# Altium PCB KOTROLER_TRANSPORTA.PcbDoc (part 4 of 4)
Units mm, origin at the board's own origin, x right, y up, seen from the top; angles counter-clockwise.
Board outline 160 x 100 mm, 2 copper layers (Top Layer, Bottom Layer); 436 components, 440 nets, 1414 pads, 154 vias.
Unrouted connection lines stored in the file: 1.
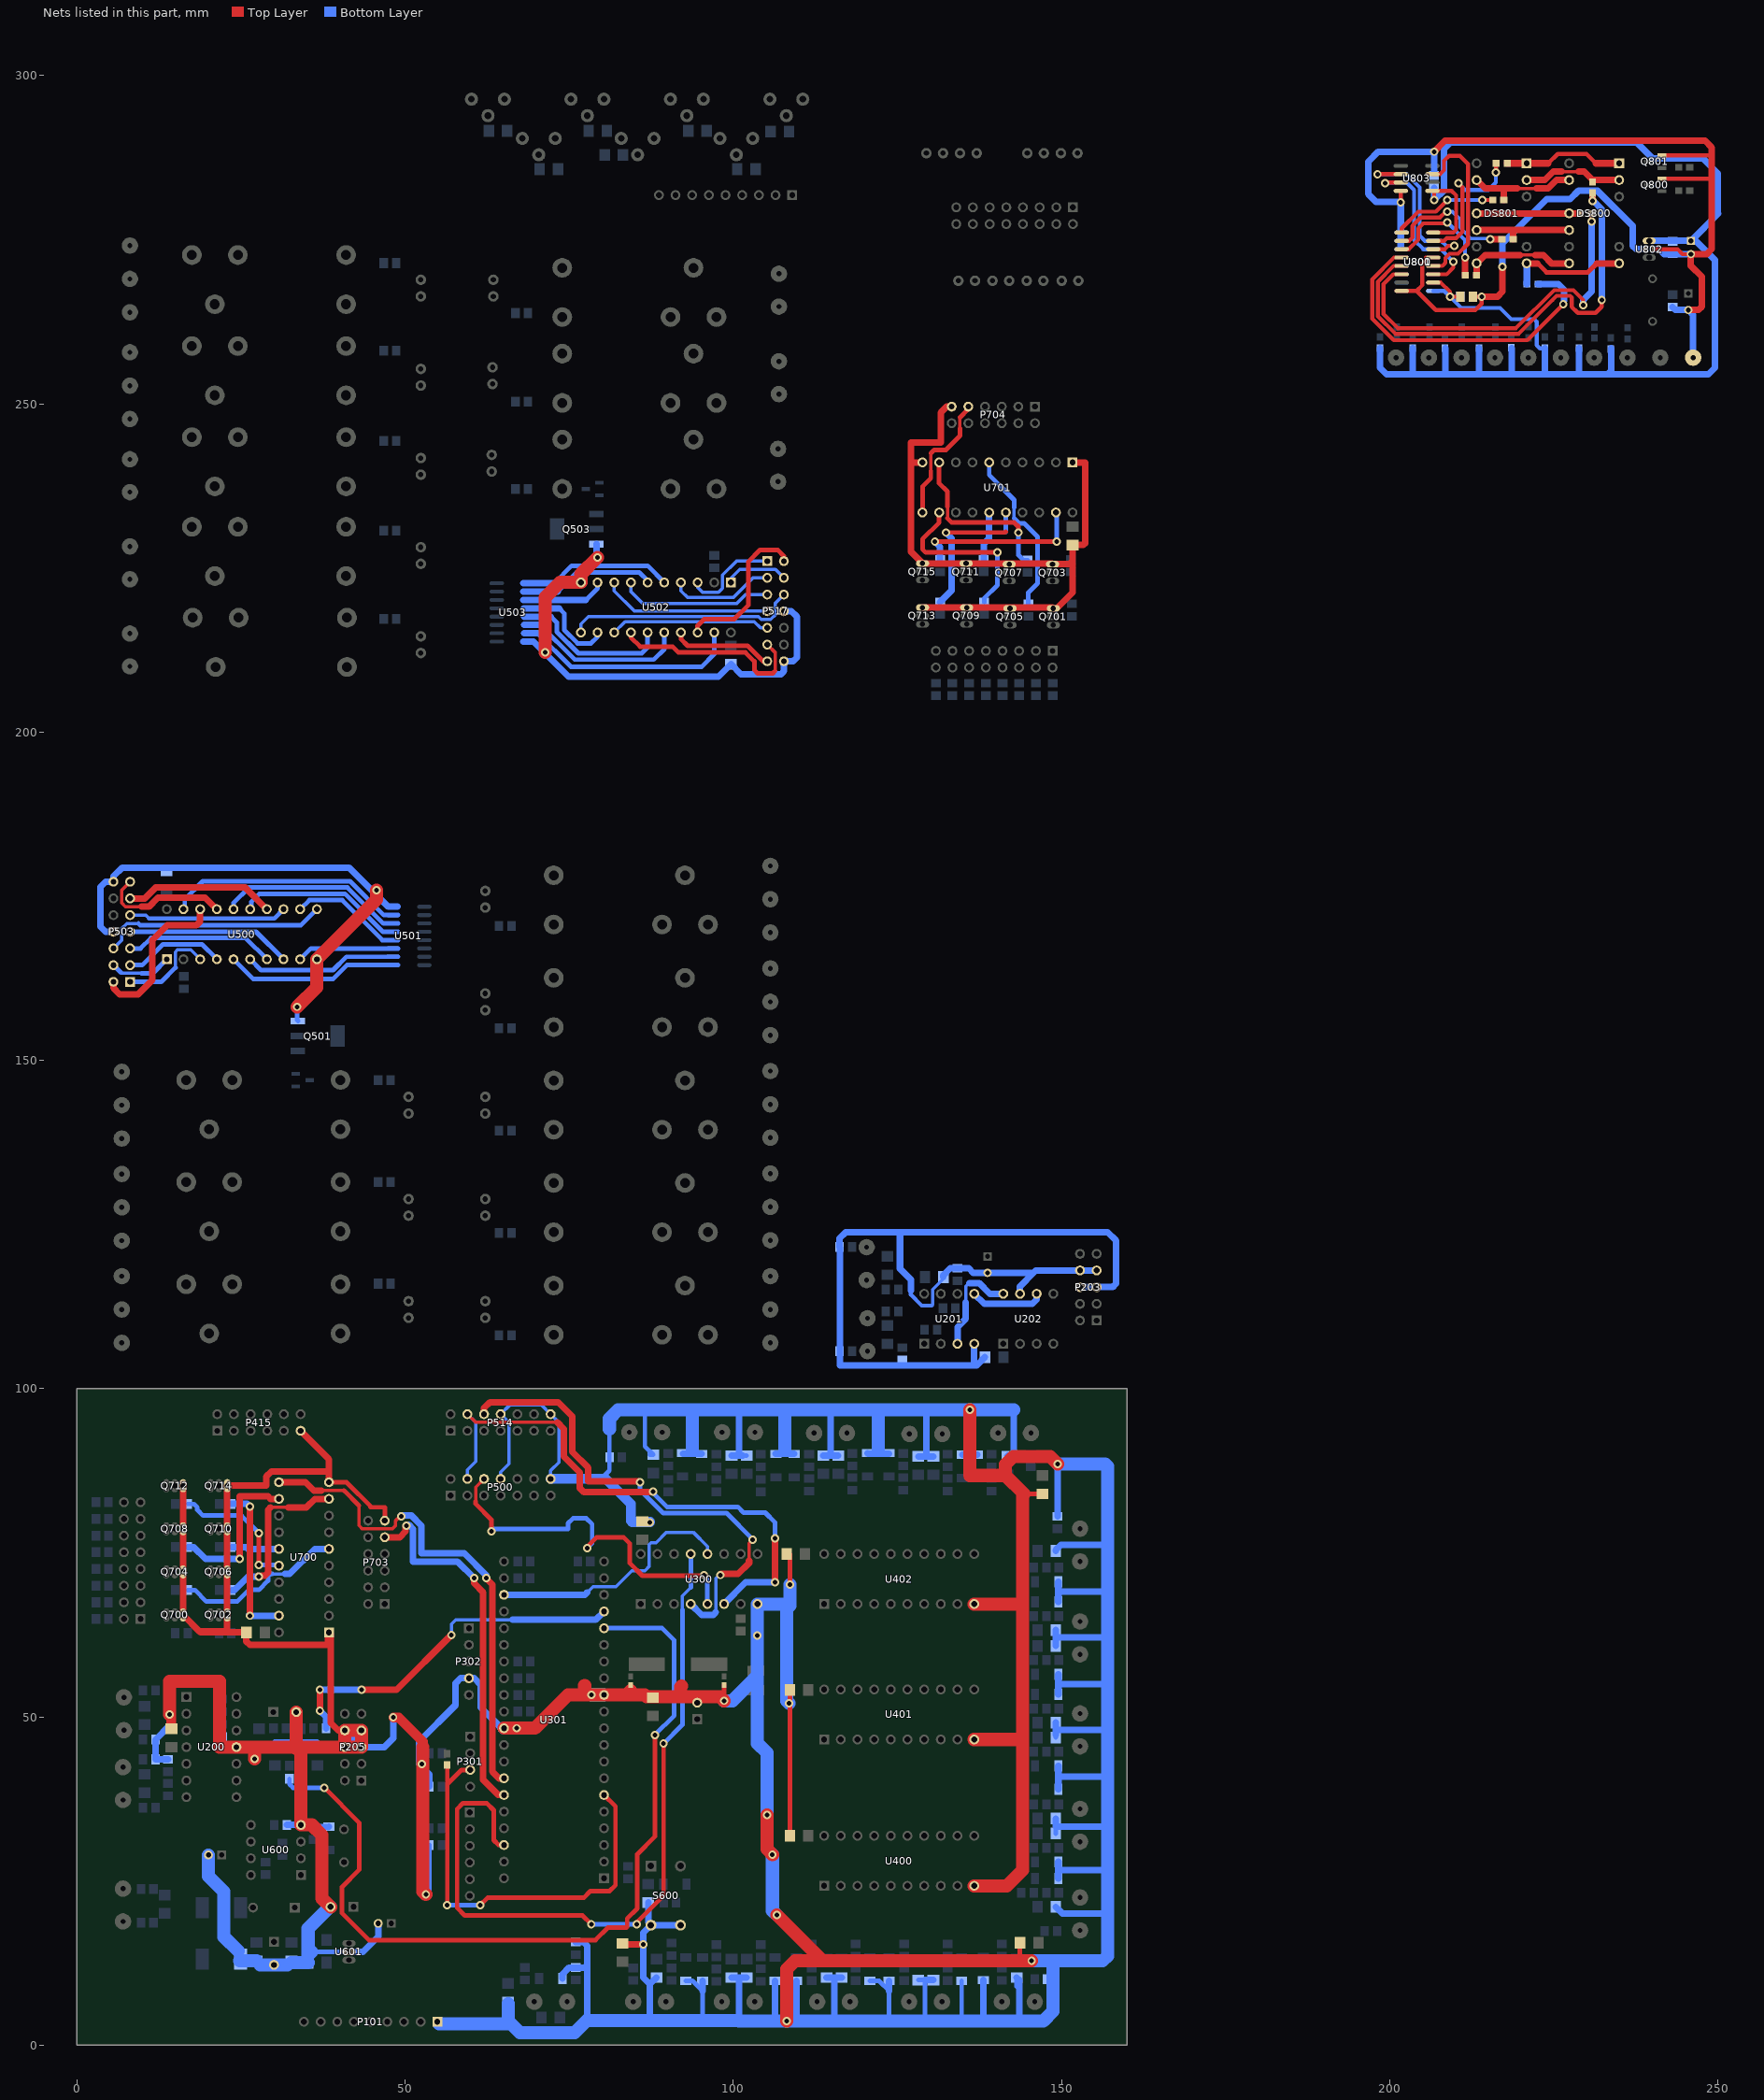
[diagram p4: the nets of this part, all layers, seen from the top]

## Via types
v1: diameter 1.27, hole 0.711, Top Layer to Bottom Layer, 154 vias

## Nets (pads, with @x,y where several pads share a name; then routed paths per layer and width w, separated by ;. In a path a pad name is that pad's centre, name@x,y a point inside that pad or via, vN(x,y) a via of type N, cw(c..) or ccw(c..) an arc to the next point about the centre after c; other vN are vias at no path point) (continued)
NetR706_2: R706.2 U700.6 | length 25.9
  Bottom Layer w0.5: 29.751,71.788 31.656,71.788
  Bottom Layer w0.7: R706.2@16.858,69.333 17.982,69.333 19.718,67.597 24.417,67.597 26.195,69.375 27.719,69.375 29.108,70.764 29.108,71.399 29.497,71.788 29.751,71.788
  Bottom Layer w1: 31.656,71.788 32.418,71.788 36.228,75.598 U700.6@38.387,75.598
NetR708_2: R708.2 U701.6 | length 25.6
  Bottom Layer w0.5: 142.781,232.57 142.781,234.221
  Bottom Layer w0.7: U701.6@138.971,241.079 138.971,239.174 142.781,235.364 142.781,234.221 ; 142.781,232.57 143.543,231.808 144.305,231.808 146.337,229.776 146.337,222.664 144.94,221.267 R708.2@144.94,219.55
NetR715_2: R715.2 U700.9 | length 26.5
  Top Layer w0.5: 29.497,81.948 32.164,81.948
  Top Layer w1: v1@27.592,71.534 v1(27.719,71.407) 27.846,71.28 28.1,71.534 28.608,71.534 29.116,72.042 29.116,81.567 29.497,81.948 ; 32.164,81.948 34.958,81.948 36.228,83.218 U700.9@38.387,83.218
  Bottom Layer w1: R715.2@23.526,69.333 23.994,69.333 26.068,71.407 v1(27.719,71.407)
NetR717_2: R717.2 U701.9 | length 26.4
  Top Layer w0.5: 132.621,232.57 132.621,234.348
  Top Layer w0.7: U701.9@131.351,241.079 131.351,237.904 132.621,236.634 132.621,234.348 ; 132.621,232.57 133.256,231.935 142.781,231.935 143.416,231.3 v1(143.416,230.411)
  Bottom Layer w0.7: v1(143.416,230.411) 143.416,226.982 144.18,226.218 R717.2@144.841,226.218
NetR724_2: R724.2 U700.12 | length 24.3
  Top Layer w1: v1(24.798,74.074) 24.798,83.599 29.116,83.599 29.497,83.218 U700.12@30.767,83.218
  Bottom Layer w1: R724.2@16.858,75.894 17.771,75.894 19.591,74.074 v1(24.798,74.074)
NetR725_2: R725.2 U701.12 | length 26.7
  Top Layer w0.7: U701.12@131.351,233.459 131.351,231.935 128.811,229.395 128.811,227.871 129.319,227.363 v1(140.241,227.363)
  Bottom Layer w0.7: R725.2@138.209,219.804 138.209,220.378 140.241,222.41 v1(140.241,227.363)
NetR726_2: R726.2 U700.15 | length 7.4
  Bottom Layer w1: R726.2@23.526,75.894 25.772,75.894 26.068,75.598 U700.15@30.767,75.598
NetR727_2: R727.2 U701.15 | length 7.5
  Bottom Layer w1: R727.2@138.152,226.345 138.152,228.703 138.971,229.522 U701.15@138.971,233.459
NetR728_2: R728.2 U700.16 | length 20.9
  Top Layer w0.7: v1(27.719,73.185) v1(27.719,78.011)
  Bottom Layer w0.7: R728.2@16.858,82.456 17.813,82.456 18.321,81.948 18.321,81.567 19.21,80.678 25.052,80.678 v1(27.719,78.011) ; v1(27.719,73.185) 30.64,73.185 U700.16@30.767,73.058
NetR729_2: R729.2 U701.16 | length 24
  Top Layer w0.7: v1(132.367,230.411) 141.384,230.411 141.511,230.538
  Bottom Layer w0.7: 141.384,230.411 141.511,230.538 U701.16@141.511,233.459
  Bottom Layer w1: R729.2@131.478,219.804 133.256,221.582 133.256,229.522 v1(132.367,230.411)
NetR730_2: R730.2 U700.19 | length 24.2
  Top Layer w1: v1(26.322,65.438) v1(26.322,82.075)
  Bottom Layer w1: R730.2@23.526,82.456 25.941,82.456 v1(26.322,82.075) ; v1@26.203,65.557 v1(26.322,65.438) U700.19@30.767,65.438
NetR731_2: R731.2 U701.19 | length 26.1
  Top Layer w0.7: v1(130.716,229.014) v1(149.258,229.014)
  Bottom Layer w0.7: U701.19@149.131,233.459 149.258,233.332 v1(149.258,229.014)
  Bottom Layer w1: v1(130.716,229.014) 131.478,228.252 R731.2@131.478,226.281
NetR800_1: R800.1 U800.15 | length 22.2
  Top Layer w0.6: U800.15@206.616,274.828 208.28,274.828 208.696,275.244 209.301,275.244 209.311,275.255 210.104,275.255 211.074,276.225 211.074,282.956 v1(210.439,283.591) ; v1(216.154,285.242) 216.193,285.281 R800.1@216.193,286.639
  Bottom Layer w0.6: v1(210.439,283.591) 211.455,282.575 215.011,282.575 216.154,283.718 v1(216.154,285.242)
NetR801_1: R801.1 U800.1 | length 16.3
  Top Layer w0.6: U800.1@201.816,276.098 201.816,276.746 204.343,279.273 207.01,279.273 v1(208.788,281.051) ; v1(214.122,281.051) R801.1@215.685,281.051
  Bottom Layer w0.6: v1(208.788,281.051) v1(214.122,281.051)
NetR802_1: R802.1 U800.2 | length 20.6
  Top Layer w0.6: U800.2@201.816,274.828 202.946,274.828 203.47,275.352 203.47,276.469 203.453,276.486 203.453,277.113 204.724,278.384 207.645,278.384 208.534,279.273 v1(208.788,279.273)
  Top Layer w1: v1(215.304,275.082) R802.1@217.082,275.082
  Bottom Layer w0.5: v1(208.788,279.273) 209.55,279.273 210.693,278.13 210.693,276.86 212.36,275.193 215.193,275.193 v1(215.304,275.082)
NetR803_1: R803.1 U800.3 | length 18.7
  Top Layer w0.6: U800.3@201.816,273.558 202.884,273.558 204.343,275.017 204.343,276.733 205.105,277.495 v1@208.788,277.495
  Top Layer w1: R803.1@211.494,269.621 v1(211.494,272.288)
  Bottom Layer w0.6: v1(208.788,277.622) 211.455,274.955 211.455,272.327 v1(211.494,272.288)
NetR804_1: R804.1 U800.4 | length 50.6
  Top Layer w0.6: U800.4@201.816,272.288 200.658,272.288 197.336,268.966 197.336,262.972 200.612,259.696 220.961,259.696 v1(226.441,265.176)
  Bottom Layer w1: R804.1@222.592,268.224 225.679,268.224 226.522,267.381 v1@226.522,265.684
NetR805_1: R805.1 U800.5 | length 67.9
  Top Layer w0.6: U800.5@201.816,271.018 200.595,271.018 198.19,268.613 198.19,263.326 200.842,260.674 219.655,260.674 224.724,265.742 224.724,265.745 225.425,266.446 227.487,266.446 227.711,266.222 227.711,264.795 228.646,263.86 231.348,263.86 232.283,264.795 v1(232.283,265.811)
  Top Layer w1: R805.1@230.886,282.106 v1(230.886,280.924) v1@231.013,280.924
  Bottom Layer w1: v1(230.886,280.924) 231.013,280.924 232.283,279.654 v1(232.283,265.811)
NetR806_1: R806.1 U800.6 | length 57.6
  Top Layer w0.6: U800.6@201.816,269.748 200.533,269.748 199.044,268.259 199.044,263.679 201.195,261.528 219.237,261.528 225.044,267.335 227.965,267.335 229.489,265.811 v1(229.489,265.049) ; v1@230.72,277.788 R806.1@230.72,279.019
  Bottom Layer w1: v1(229.489,265.049) 229.489,265.811 230.759,267.081 v1(230.759,277.749)
NetU201_3: U201.3 U202.8 | length 15.9
  Bottom Layer w0.5: 135.415,113.19 135.415,115.603 135.923,116.111
  Bottom Layer w1: U201.3@134.145,106.84 134.145,109.38 135.415,110.65 135.415,113.19 ; 135.923,116.111 137.447,116.111 139.098,114.46 U202.8@141.13,114.46
NetU201_5: U201.5 U202.6 | length 11.3
  Bottom Layer w1: U201.5@136.685,114.46 138.209,112.936 145.575,112.936 146.21,113.571 U202.6@146.21,114.46
NetU500_5: U500.5 U501.1 | length 27.2
  Bottom Layer w0.7: U500.5@23.846,165.41 26.832,162.424 39.036,162.424 41.133,164.521 U501.1@48.928,164.521
NetU500_6: U500.6 U501.2 | length 24.1
  Bottom Layer w0.7: U500.6@26.386,165.41 28.037,163.759 39.022,163.759 41.054,165.791 U501.2@48.928,165.791
NetU500_9: U500.9 U501.3 | length 15.6
  Bottom Layer w0.7: U500.9@34.006,165.41 35.657,167.061 U501.3@48.928,167.061
NetU500_12: U500.12 U501.4 | length 18
  Bottom Layer w0.7: U500.12@34.006,173.03 35.403,174.427 40.419,174.427 46.515,168.331 U501.4@48.928,168.331
NetU500_15: U500.15 U501.5 | length 26.5
  Bottom Layer w0.7: U500.15@26.386,173.03 26.576,173.22 26.576,174.173 27.784,175.381 40.814,175.381 46.594,169.601 U501.5@48.928,169.601
NetU500_16: U500.16 U501.6 | length 29.3
  Bottom Layer w0.7: U500.16@23.846,173.03 23.846,173.983 26.198,176.335 41.209,176.335 46.673,170.871 U501.6@48.928,170.871
NetU500_19: U500.19 U501.7 | length 37.4
  Bottom Layer w0.7: U500.19@16.416,173.22 16.416,174.554 19.151,177.289 41.604,177.289 46.753,172.141 U501.7@48.928,172.141
  Bottom Layer w1: U500.19@16.226,173.03 U500.19@16.416,173.22
NetU502_5: U502.5 U503.1 | length 23.6
  Bottom Layer w0.7: 72.706,222.679 75.373,225.346 86.93,225.346 U502.5@89.47,222.806
  Bottom Layer w1: U503.1@68.007,222.679 72.706,222.679
NetU502_6: U502.6 U503.2 | length 20.9
  Bottom Layer w0.5: U502.6@86.93,222.806 U502.6@86.93,223.06
  Bottom Layer w0.7: 73.214,221.409 76.135,224.33 85.66,224.33 U502.6@86.93,223.06
  Bottom Layer w1: U503.2@68.007,221.409 73.214,221.409
NetU502_9: U502.9 U503.3 | length 12.9
  Bottom Layer w0.7: 77.532,220.139 79.31,221.917 U502.9@79.31,222.806
  Bottom Layer w1: U503.3@68.007,220.139 77.532,220.139
NetU502_12: U502.12 U503.4 | length 16
  Bottom Layer w0.5: U502.12@79.31,214.551 U502.12@79.31,215.186
  Bottom Layer w0.7: 73.468,218.869 74.23,218.107 74.23,215.567 76.262,213.535 78.294,213.535 U502.12@79.31,214.551
  Bottom Layer w1: U503.4@68.08,218.869 73.468,218.869
NetU502_15: U502.15 U503.5 | length 24.6
  Bottom Layer w0.7: 72.198,217.599 73.087,216.71 73.087,215.299 76.375,212.011 86.033,212.011 86.93,212.908 U502.15@86.93,215.186
  Bottom Layer w1: U503.5@68.134,217.599 72.198,217.599
NetU502_16: U502.16 U503.6 | length 26.7
  Bottom Layer w0.7: 70.547,216.329 75.822,211.055 87.879,211.055 89.47,212.646 U502.16@89.47,215.186
  Bottom Layer w1: U503.6@68.134,216.329 70.547,216.329
NetU502_19: U502.19 U503.7 | length 35.2
  Bottom Layer w0.7: 70.166,215.059 75.246,209.979 95.185,209.979 97.09,211.884 U502.19@97.09,215.186
  Bottom Layer w1: U503.7@68.134,215.059 70.166,215.059
O1_DATA0: P517.1 U502.3 | length 14.8
  Bottom Layer w0.5: U502.3@94.55,222.806 94.55,222.044 95.312,221.282 97.725,221.282 98.36,221.917 98.36,223.949 100.456,226.045 P517.1@105.155,226.045
O1_DATA1: P517.3 U502.4 | length 16.1
  Bottom Layer w0.5: U502.4@92.01,222.806 92.01,221.536 93.026,220.52 100.011,220.52 102.996,223.505 P517.3@105.155,223.505
O1_DATA2: P517.5 U502.7 | length 23.5
  Bottom Layer w0.5: U502.7@84.39,222.806 84.39,221.409 86.168,219.631 100.519,219.631 101.853,220.965 P517.5@105.155,220.965
O1_DATA3: P517.7 U502.8 | length 25.9
  Bottom Layer w0.5: U502.8@81.85,222.806 81.85,221.536 84.962,218.425 P517.7@105.155,218.425
O1_DATA4: P517.9 U502.13 | length 24.4
  Bottom Layer w0.5: U502.13@81.85,215.186 83.501,216.837 103.186,216.837 104.139,215.885 P517.9@105.155,215.885
O1_DATA5: P517.11 U502.14 | length 30.5
  Top Layer w0.5: P517.11@105.155,213.345 106.409,212.091 106.409,209.392 106.361,209.344
  Top Layer w0.7: U502.14@84.39,215.186 84.39,214.424 85.787,213.027 90.74,213.027 91.629,212.138 101.837,212.138 103.186,210.789 103.186,209.471 103.694,208.963 105.98,208.963 106.361,209.344
O1_DATA6: P517.13 U502.17 | length 15.6
  Top Layer w0.7: U502.17@92.01,215.186 92.01,214.17 93.026,213.154 102.17,213.154 104.52,210.805 P517.13@105.155,210.805
O1_DATA7: P517.2 U502.18 | length 24
  Top Layer w0.7: U502.18@94.55,215.186 94.55,216.219 95.549,217.218 100.138,217.218 102.297,219.377 102.297,225.981 104.075,227.759 106.742,227.759 107.695,226.807 P517.2@107.695,226.045
O1_OUT_CLK: P517.6 U502.11 | length 35.5
  Bottom Layer w0.5: U502.11@76.77,215.186 76.77,216.456 77.913,217.599 103.821,217.599 104.25,217.171 105.674,217.171 106.409,217.905 106.409,219.679 P517.6@107.695,220.965
O1_OUT_ENABLE: P517.4 U502.1 | length 9.8
  Bottom Layer w0.5: U502.1@99.63,222.806 99.63,223.441 100.98,224.791 106.409,224.791 P517.4@107.695,223.505
O2_DATA0: P503.1 U500.3 | length 14.7
  Bottom Layer w0.5: 15.019,164.14 14.972,164.187 14.972,166.506 15.305,166.839 17.337,166.839 U500.3@18.766,165.41
  Bottom Layer w0.7: P503.1@8.098,161.981 12.86,161.981 15.019,164.14
O2_DATA1: P503.3 U500.4 | length 15.5
  Bottom Layer w0.7: P503.3@8.098,164.521 9.939,164.521 13.111,167.693 19.023,167.693 U500.4@21.306,165.41
O2_DATA2: P503.5 U500.7 | length 22.8
  Bottom Layer w0.7: P503.5@8.098,167.061 9.685,167.061 11.271,168.647 25.689,168.647 U500.7@28.926,165.41
O2_DATA3: P503.7 U500.8 | length 25.1
  Bottom Layer w0.7: P503.7@8.098,169.601 27.275,169.601 U500.8@31.466,165.41
O2_DATA4: P503.9 U500.13 | length 24.2
  Bottom Layer w0.5: P503.9@8.098,172.141 10.479,172.141 10.987,171.633
  Bottom Layer w0.7: 10.987,171.633 30.069,171.633 U500.13@31.466,173.03
O2_DATA5: P503.11 U500.14 | length 22.9
  Top Layer w1: P503.11@8.098,174.681 10.32,174.681 11.971,176.332 25.624,176.332 U500.14@28.926,173.03
O2_DATA6: P503.13 U500.17 | length 19.8
  Top Layer w0.5: P503.13@8.098,177.221 6.844,175.967 6.844,173.966 7.399,173.411 9.812,173.411
  Top Layer w1: 9.812,173.411 10.955,173.411 12.352,174.808 19.528,174.808 U500.17@21.306,173.03
O2_DATA7: P503.2 U500.18 | length 24.6
  Top Layer w1: P503.2@5.558,161.981 5.558,161.028 6.51,160.076 9.304,160.076 11.463,162.235 11.463,168.331 13.749,170.617 18.194,170.617 18.766,171.189 U500.18@18.766,173.03
O2_OUT_CLK: P503.6 U500.11 | length 34.7
  Bottom Layer w0.5: P503.6@5.558,167.061 6.844,168.347 6.844,170.12 7.595,170.871 9.368,170.871
  Bottom Layer w0.7: 9.368,170.871 9.622,170.617 34.133,170.617 U500.11@36.546,173.03
O2_OUT_ENABLE: P503.4 U500.1 | length 9.5
  Bottom Layer w0.5: 6.701,163.378 6.812,163.267 9.796,163.267
  Bottom Layer w0.7: P503.4@5.558,164.521 6.701,163.378 ; 9.796,163.267 11.543,163.267 U500.1@13.686,165.41
OUT1_CLK: P514.10 U300.4 | length 75.9
  Top Layer w0.5: 102.395,73.82 102.395,76.487 v1(102.903,76.995)
  Top Layer w1: P514.10@62.009,96.135 62.009,97.061 62.898,97.95 73.312,97.95 75.455,95.807 75.455,90.407 77.868,87.994 77.868,85.885 85.631,85.885 v1(85.758,85.758) ; v1(98.044,71.628) 98.044,71.755 98.077,71.788 100.744,71.788 102.395,73.439 102.395,73.82
  Bottom Layer w0.5: 97.315,65.946 97.315,71.153 v1@98.077,71.915
  Bottom Layer w0.7: v1(85.758,85.758) 85.758,84.615 89.314,81.059 98.982,81.059 v1@102.903,77.138
  Bottom Layer w1: U300.4@93.505,67.216 95.156,65.565 96.934,65.565 97.315,65.946 ; v1(102.903,76.995) v1@102.903,77.138
OUT2_CLK: P500.10 U300.5 | length 58
  Top Layer w0.5: 60.739,82.837 60.739,84.996 P500.10@62.009,86.266
  Top Layer w0.7: 60.739,82.837 60.739,82.456 63.152,80.043 v1(63.152,78.265) ; v1@77.63,75.852 79.121,77.343 83.312,77.343 84.234,76.421 84.234,73.433 86.133,71.534 v1@95.156,71.534
  Bottom Layer w0.7: v1(63.152,78.265) 63.152,78.519 63.279,78.646 74.803,78.646 74.803,79.502 75.565,80.264 77.597,80.264 78.486,79.375 78.486,76.454 v1(77.757,75.725) ; v1@95.283,71.661 96.045,70.899 U300.5@96.045,67.038 ; v1@95.41,71.722 v1(95.504,71.628)
OUTPUT_ENABLE: P500.9 P514.9 U300.6 | length 86.9
  Top Layer w0.5: P514.9@59.469,96.135 60.723,94.881 73.206,94.881
  Top Layer w1: 73.206,94.881 74.201,93.886 74.201,89.695 76.614,87.282 76.614,84.869 77.249,84.234 v1@87.79,84.234 ; v1(106.332,70.518) v1(106.332,77.249)
  Bottom Layer w0.5: P500.9@59.469,86.266 59.469,87.663 60.739,88.933 60.739,94.865 P514.9@59.469,96.135
  Bottom Layer w0.7: v1(87.79,84.361) 87.79,84.107 89.884,82.013 100.679,82.013 101.554,81.138 104.856,81.138 106.332,79.662 v1(106.332,77.249)
  Bottom Layer w1: U300.6@98.585,67.216 101.887,70.518 v1(106.332,70.518)
PWM1_OUT: R203.1 U301.16 | length 132.8
  Top Layer w0.7: v1(37.676,39.225) 42.984,33.917 42.984,26.728 40.386,24.13 40.386,20.107 44.458,16.035 78.994,16.035 80.866,17.907 83.693,17.907 83.82,18.034 83.82,19.304 85.344,20.828 85.344,29.083 88.044,31.783 v1(88.044,47.277)
  Bottom Layer w0.7: R203.1@32.357,40.593 32.357,39.784 32.916,39.225 v1(37.676,39.225) ; U301.16@80.297,63.533 89.156,63.533 90.999,61.69 90.999,50.232 v1(88.044,47.277)
PWM2_OUT: R209.1 U301.17 | length 55.5
  Top Layer w1: v1(36.99,50.96) v1(36.99,54.135) ; v1(43.34,54.135) 48.674,54.135 v1(57.056,62.517)
  Bottom Layer w0.5: v1(57.056,62.517) 57.056,64.168 57.691,64.803 66.327,64.803
  Bottom Layer w1: v1(36.99,50.96) 37.94,50.01 R209.1@37.94,48.266 ; v1(36.99,54.135) v1(43.34,54.135) ; 66.327,64.803 79.027,64.803 U301.17@80.297,66.073
SEG_A: DS800.1 DS801.1 R800.2 | length 18.2
  Top Layer w0.6: 224.155,286.639 225.587,288.071 229.962,288.071 231.394,286.639
  Top Layer w1: R800.2@217.893,286.639 DS801.1@220.853,286.639 224.155,286.639 ; 231.394,286.639 DS800.1@234.95,286.639
SEG_B: DS800.13 DS801.13 R801.2 | length 17
  Top Layer w0.5: 219.456,282.829 222.377,282.829
  Top Layer w1: DS801.13@213.233,284.099 214.503,282.829 217.297,282.829 ; R801.2@217.385,281.051 217.385,282.741 217.297,282.829 ; 219.456,282.829 217.297,282.829 ; 222.377,282.829 224.15,282.829 225.42,284.099 DS800.13@227.33,284.099
SEG_C: DS800.10 DS801.10 R802.2 | length 15.4
  Top Layer w1: DS801.10@213.233,276.479 DS800.10@227.33,276.479 ; R802.2@218.782,275.082 218.782,276.391
SEG_D: DS800.8 DS801.8 R803.2 | length 16.9
  Top Layer w0.5: 219.837,272.669 222.123,272.669
  Top Layer w1: R803.2@213.194,269.621 213.233,269.66 DS801.8@213.233,271.399 214.503,272.669 219.837,272.669 ; 222.123,272.669 223.393,272.669 224.663,271.399 DS800.8@227.33,271.399
SEG_E: DS800.7 DS801.7 R804.2 | length 18.4
  Top Layer w0.7: 222.504,271.399 223.858,270.045 230.167,270.045 230.251,270.129
  Top Layer w0.76: 230.251,270.129 231.521,271.399
  Top Layer w1: DS801.7@220.853,271.399 222.504,271.399 ; 231.521,271.399 DS800.7@234.95,271.399
  Bottom Layer w1: DS801.7@220.853,271.399 220.892,271.36 R804.2@220.892,268.224
SEG_F: DS800.2 DS801.2 R805.2 | length 15.2
  Top Layer w0.5: 226.187,285.369 228.727,285.369
  Top Layer w1: DS801.2@220.853,284.099 DS801.2@220.853,284.099 223.647,284.099 224.917,285.369 226.187,285.369 ; 228.727,285.369 229.615,285.369 230.885,284.099 DS800.2@234.95,284.099
SEG_G: DS800.11 DS801.11 R806.2 | length 15.8
  Top Layer w1: DS801.11@213.233,279.019 DS800.11@227.33,279.019 R806.2@229.02,279.019
SH_CLK: U800.11 U801.11 U803.7 | length 26.2
  Top Layer w0.6: v1(199.263,283.591) 199.39,283.718 U803.7@201.689,283.718 ; U800.11@206.616,269.748 208.661,269.748 209.677,270.764 v1(209.677,271.653)
  Bottom Layer w0.6: 199.898,283.718 202.565,283.718 203.708,282.575 203.708,274.955 205.105,273.558 U801.11@206.616,273.558 207.742,273.558 209.393,271.907 209.677,271.907 v1(209.677,271.653)
SH_DATA: U800.14 U801.10 U803.6 | length 27.5
  Top Layer w0.6: v1(198.12,284.988) U803.6@201.689,284.988 ; U800.14@206.616,273.558 208.407,273.558 208.915,274.066 v1(209.804,274.066)
  Bottom Layer w0.6: v1(198.12,284.988) 202.565,284.988 204.562,282.991 204.562,275.625 205.359,274.828 U801.10@206.616,274.828 207.839,274.828 208.601,274.066 v1(209.804,274.066)
SH_LATCH: U800.12 U803.3 | length 27.2
  Top Layer w0.6: U803.3@206.489,284.988 207.645,284.988 208.28,285.623 208.28,287.02 209.042,287.782 210.693,287.782 211.928,286.547 211.928,274.403 210.402,272.877 209.123,272.877 208.488,272.242 208.488,271.48 208.026,271.018 U800.12@206.616,271.018
SHIFT_LATCH: U300.12 U301.23 | length 38.9
  Bottom Layer w0.5: 77.759,68.992 78.635,69.867 82.085,69.867 84.514,72.296 86.52,72.296 87.171,72.947 87.171,76.249 87.453,76.531 88.215,76.531 89.822,78.138 93.886,78.138 96.045,75.979 U300.12@96.045,74.836
  Bottom Layer w1: U301.23@65.057,68.613 77.381,68.613 77.759,68.992
SHIFT_OE: U300.13 U301.38 | length 116.1
  Top Layer w0.7: U301.38@65.057,30.513 64.229,30.513 63.5,31.242 63.5,35.804 62.415,36.888 58.809,36.888 57.912,35.992 57.912,20.945 59.088,19.769 77.02,19.769 v1(78.341,18.448) ; v1(85.25,18.448) 85.25,18.702 89.365,22.817 v1(89.365,45.956)
  Bottom Layer w0.5: 92.235,66.327 92.235,68.454 93.505,69.724
  Bottom Layer w0.7: v1(78.341,18.448) v1(85.25,18.448) ; v1(89.365,45.956) 92.235,48.826 92.235,66.327 ; 93.505,69.724 U300.13@93.505,74.836
SIG1_CLK: U301.34 U700.11 | length 76.6
  Top Layer w0.5: 37.244,84.488 40.673,84.488 ; 42.959,82.202 42.959,79.154 43.467,78.646 48.039,78.646 48.547,79.154 48.547,79.916 49.309,80.678 v1(49.403,80.584)
  Top Layer w0.7: 40.673,84.488 42.959,82.202
  Top Layer w1: U700.11@30.767,85.758 34.831,85.758 36.101,84.488 37.244,84.488 ; v1@62.357,71.12 63.295,70.182 63.295,41.673 64.295,40.673 U301.34@65.057,40.673
  Bottom Layer w1: v1(49.403,80.584) 49.309,80.678 50.96,80.678 52.484,79.154 52.484,74.93 58.994,74.93 62.357,71.567 v1@62.357,71.12
  other v1: 62.357,71.153
SIG2_CLK: P703.9 U301.35 | length 56.6
  Top Layer w1: P703.9@46.896,77.376 49.182,77.376 50.071,78.265 50.071,79.027 v1(50.198,79.154) ; v1(60.485,71.153) 60.485,70.391 61.89,68.986 61.89,40.411 64.168,38.133 U301.35@65.057,38.133
  Bottom Layer w1: v1(50.198,79.154) 50.579,79.154 50.579,79.281 51.214,78.646 51.214,73.66 57.978,73.66 v1(60.485,71.153)
SIG_2_CLK: P704.9 U701.11 | length 20.1
  Top Layer w0.5: 130.081,239.809 130.081,242.476 ; 134.526,246.286 134.526,247.937
  Top Layer w0.7: U701.11@128.811,233.459 128.811,237.396 130.081,238.666 130.081,239.809 ; 130.081,242.476 130.589,242.984 132.367,242.984 134.526,245.143 134.526,246.286 ; 134.526,247.937 135.796,249.207 P704.9@135.796,249.588
T0CKI: P301.3 R313.1 U301.6 | length 67.2
  Top Layer w0.7: R313.1@56.388,42.711 56.421,42.678 56.421,39.784 ; v1(56.389,21.344) 56.421,21.344 56.421,39.784 ; P301.3@59.914,41.943 58.58,41.943 56.421,39.784 ; v1(61.425,21.344) 62.56,22.479 77.216,22.479 78.232,23.495 81.153,23.495 82.042,24.384 82.042,36.388 U301.6@80.297,38.133
  Bottom Layer w0.7: v1(56.389,21.344) v1(61.425,21.344)
VDD_ED: C800.2 C801.1 C803.1 C805.1 C806.1 R809.2 R810.2 R811.2 R812.2 R821.1 R822.1 R823.1 R824.1 U800.10 U800.16 U801.16 U802.1 U803.1 | length 220.4
  Top Layer w0.6: U800.10@206.616,268.478 207.772,268.478 209.169,267.081 v1(209.169,266.319) C800.2@210.759,266.319 ; U800.16@206.616,276.098 208.947,276.098 208.958,276.109 209.688,276.109 210.093,276.514 210.093,281.778 209.423,282.448 206.756,282.448 v1(206.756,281.051)
  Bottom Layer w0.6: U801.16@206.616,267.208 208.28,267.208 v1(209.169,266.319) ; C801.1@210.759,266.319 v1(209.169,266.319) ; R823.1@223.6,258.484 223.561,258.445 222.885,258.445 222.377,258.953 222.377,262.509 221.996,262.89 218.505,262.89 216.797,264.598 210.89,264.598 v1(209.169,266.319)
  Bottom Layer w1: R809.2@198.501,258.484 198.501,255.524 199.517,254.508 213.614,254.508 ; 203.501,254.555 R810.2@203.501,258.484 ; C805.1@206.756,282.895 v1(206.756,281.051) 208.288,282.583 208.288,288.865 209.229,289.806 237.62,289.806 240.033,287.393 247.717,287.393 249.992,285.118 249.992,279.074 250.063,279.003 C803.1@245.888,274.828 ; 208.454,254.555 R811.2@208.454,258.484 ; R812.2@213.614,258.484 213.614,254.508 ; R824.1@218.567,258.484 218.567,254.508 ; 223.647,254.635 R823.1@223.647,258.484 ; R822.1@228.854,258.484 228.854,254.508 ; R821.1@233.76,258.484 233.76,255.096 233.172,254.508 ; U802.1@239.522,274.828 C803.1@245.888,274.828 ; 213.614,254.508 218.567,254.508 ; 218.567,254.508 228.854,254.508 ; 228.854,254.508 233.172,254.508 ; 233.172,254.508 248.539,254.508 249.555,255.524 249.555,271.907 246.634,274.828 C803.1@245.888,274.828
VSS: C108.2 C200.1 C201.2 C202.1 C203.1 C206.1 C207.1 C300.2 C301.1 C302.2 C303.1 C304.1 C400.1 C401.2 C402.2 C403.2 C404.2 C405.2 C406.2 C407.2 C408.2 C409.2 C410.1 C411.2 C412.2 C413.2 C414.2 C415.2 C416.2 C417.2 C418.2 C419.2 C420.1 C421.2 C422.2 C423.2 C424.2 C425.2 C426.2 C427.2 C428.2 C429.2 C600.2 C602.1 C603.1 C604.2 C605.1 C606.2 C607.1 C608.2 C609.1 C610.1 C700.2 D100.1 D400.1 D401.1 D402.1 D403.1 D404.1 D405.1 D406.1 D407.1 D408.1 D409.1 D410.1 D411.1 D412.1 D413.1 D414.1 D415.1 D416.1 D417.1 D418.1 D419.1 D420.1 D421.1 D422.1 D423.1 D601.1 L601.1 P101.1 P205.5 P205.6 P205.7 P205.8 P302.4 P415.11 P500.11 P500.14 P514.11 P514.14 P703.11 Q700.3 Q702.3 Q704.3 Q706.3 Q708.3 Q710.3 Q712.3 Q714.3 R108.2 R109.1 R201.1 R206.1 R207.1 R211.1 R301.1 R304.1 R417.2 R435.2 R453.2 R604.1 S600.2 S600.4 U200.11 U300.8 U301.12 U301.31 U400.10 U401.10 U402.10 U600.4 U601.2 U700.1 U700.10 | length 1359.5
  Top Layer w0.7: U700.10@38.387,85.758 41.054,85.758 44.864,81.948 ; 39.784,47.959 P205.8@40.8,47.959 ; P205.6@40.8,45.583 42.832,45.583 P205.5@43.34,46.091 ; 44.737,81.948 44.864,81.948 ; P703.11@46.896,79.916 46.896,81.948 44.864,81.948 ; 52.509,45.601 52.705,45.405 ; C304.1@84.361,54.882 84.361,54.265 84.618,54.008 ; C300.2@85.885,79.792 85.885,79.713 87.511,79.713 87.46,79.662 v1(87.282,79.662) ; v1(98.585,52.484) C303.1@98.585,54.882 ; C421.2@108.107,74.836 108.615,74.836 v1(108.615,70.162) ; C401.2@108.615,31.91 C411.2@108.615,54.135 ; 143.645,12.86 143.667,12.838 143.667,12.86 C410.1@143.667,15.618 ; 144.051,83.977 144.254,83.977 ; 144.305,83.977 C420.1@147.085,83.977
  Top Layer w1: v1(14.13,50.372) v1@14.384,50.118 ; Q712.3@16.162,85.235 Q708.3@16.162,78.673 Q704.3@16.162,72.112 Q700.3@16.162,65.55 18.687,63.025 ; P415.11@34.069,93.595 38.387,89.277 38.387,87.409 ; U700.10@38.387,85.758 38.387,87.409 ; 39.784,47.959 38.641,49.102 38.641,62.644 U700.1@38.387,62.898 38.26,62.771 38.26,60.993 26.322,60.993 25.811,61.504 C700.2@25.811,62.898 18.814,62.898 18.687,63.025 ; C400.1@83.091,15.53 83.221,15.4 v1(86.266,15.4) ; 143.543,12.758 143.645,12.86 ; 18.687,63.025 22.893,63.025 Q702.3@22.893,65.55 Q706.3@22.893,72.112 Q710.3@22.893,78.673 Q714.3@22.893,85.235 28.862,85.235 28.862,86.647 29.624,87.409 38.387,87.409
  Top Layer w1.5: C200.1@14.384,48.216 v1@14.384,50.118 ; v1@48.246,49.944 48.989,49.944 52.705,46.228 52.705,45.405
  Top Layer w2: v1@14.097,50.372 14.097,55.452 21.75,55.452 21.75,45.419 U200.11@24.29,45.419 ; v1(27.084,43.641) 27.084,45.419 U200.11@24.29,45.419 ; 33.406,45.217 C201.2@33.406,50.753 ; 34.109,44.904 U600.4@34.109,33.561 35.781,33.561 37.338,32.004 37.338,22.38 C606.2@38.636,21.082 ; P205.5@43.34,45.419 P205.6@40.8,45.419 ; P205.5@43.34,45.546 43.34,46.091 P205.7@43.34,47.959 P205.8@40.8,47.959 40.8,45.583 P205.6@40.8,45.419 ; 52.705,45.405 52.705,23.409 v1(53.144,22.969) ; U301.31@65.057,48.293 v1(66.962,48.293) 69.756,48.293 74.836,53.373 77.343,53.373 ; 77.343,54.777 77.343,53.373 ; 84.361,54.008 83.726,53.373 ; 92.095,54.737 91.948,54.59 91.948,53.122 ; v1(98.585,52.484) 97.947,53.122 91.948,53.122 ; v1(105.138,35.085) 105.138,29.878 v1(105.951,29.065) ; v1(106.611,19.845) 113.596,12.86 ; v1(108.11,3.716) 108.11,11.59 109.38,12.86 113.596,12.86 ; v1(136.05,96.763) 136.05,86.791 141.44,86.791 ; U400.10@136.685,24.29 141.638,24.29 144.051,26.703 144.051,46.515 ; U401.10@136.685,46.579 143.988,46.579 144.051,46.515 ; U402.10@136.685,67.216 144.051,67.216 ; 144.051,83.977 144.051,67.216 ; 144.254,83.977 141.44,86.791 ; v1(145.448,12.86) 143.667,12.86 143.645,12.86 113.596,12.86 ; v1(149.385,88.552) 148.242,89.695 142.654,89.695 141.44,88.481 141.44,86.791 ; U200.11@24.29,45.419 P205.6@40.8,45.419 ; 77.343,53.373 v1(78.392,53.373) U301.12@80.297,53.373 83.726,53.373 ; 83.726,53.373 86.504,53.373 86.755,53.122 91.948,53.122 ; 144.051,46.515 144.051,67.216
  Bottom Layer w0.5: P500.11@64.549,86.266 64.549,87.282 65.819,88.552 65.819,94.865 P514.11@64.549,96.135 65.983,97.569 70.735,97.569 P514.14@72.169,96.135 73.439,94.865 73.439,88.806 72.169,87.536 P500.14@72.169,86.266
  Bottom Layer w0.7: L601.1@24.802,12.86 L601.1@24.802,13.114 ; C203.1@30.132,45.422 30.132,46.286 36.609,46.286 C202.1@36.609,45.422 36.606,45.397 33.942,45.397 C206.1@33.942,45.416 ; C603.1@32.672,12.606 32.547,12.732 C603.1@32.672,12.857 ; C607.1@35.209,12.606 35.209,13.746 ; 35.72,14.257 U601.2@41.435,14.257 ; 43.303,46.689 43.303,45.456 P205.5@43.34,45.419 ; P205.7@43.303,47.922 P205.7@43.34,47.959 ; v1(53.144,22.969) 53.693,23.518 R301.1@53.693,30.513 ; R108.2@75.979,15.715 R108.2@75.979,15.73 ; 79.841,86.266 81.111,87.536 81.111,93.887 ; 86.647,96.763 86.52,96.636 86.52,91.208 87.776,89.952 C429.2@87.257,89.952 ; D400.1@92.743,9.815 93.756,9.815 95.283,8.288 95.283,4.224 95.715,3.792 ; C427.2@101.404,89.825 C427.2@102,89.825 ; D404.1@120.81,9.815 122.204,9.815 123.731,8.288 123.731,4.707 ; C407.2@128.176,9.936 129.192,9.936 129.192,4.707 ; 134.78,4.707 D406.1@134.78,9.815 ; 143.162,8.974 C409.2@143.162,10.317 ; C413.2@149.134,32.255 149.134,33.18 ; C415.2@149.134,46.86 C415.2@149.134,47.226
  Bottom Layer w1: R201.1@13.876,43.575 13.855,43.554 R211.1@11.97,43.554 R206.1@11.97,46.562 14.13,48.722 v1(14.13,50.372) ; R207.1@22.131,47.009 22.131,46.181 22.893,45.419 U200.11@24.29,45.419 C207.1@27.719,45.419 ; L601.1@24.548,14.38 24.548,12.86 L601.1@24.802,12.86 ; v1(27.084,43.641) 27.084,44.781 C207.1@27.719,45.416 C207.1@27.719,45.419 ; C602.1@27.335,12.86 C602.1@27.338,12.857 C602.1@27.942,12.253 ; R604.1@31.971,33.561 U600.4@34.109,33.561 35.781,33.561 C605.1@36.101,33.241 38.324,33.241 D601.1@38.387,33.304 ; C603.1@32.068,12.253 C603.1@32.547,12.732 ; C206.1@33.942,45.416 C206.1@33.942,45.419 ; C202.1@36.609,45.422 36.606,45.419 C206.1@33.942,45.419 ; U601.2@41.435,14.257 43.594,14.257 45.896,16.559 C608.2@45.896,18.575 ; 43.303,46.689 43.303,47.922 42.07,46.689 ; P205.7@43.34,47.959 P205.8@40.8,47.959 ; v1(48.166,49.944) 48.166,46.769 46.816,45.419 P205.5@43.34,45.419 P205.6@40.8,45.419 ; R304.1@53.693,39.403 53.693,41.242 52.103,42.832 v1(52.509,42.832) 52.103,43.238 52.103,46.256 57.691,51.844 57.691,55.151 58.453,55.913 60.485,55.913 61.501,54.897 61.501,51.468 64.676,48.293 U301.31@65.057,48.293 ; P101.1@54.897,3.589 P101.1@55.184,3.302 ; D100.1@73.944,10.193 73.944,10.825 74.962,11.843 R109.1@75.979,11.843 77.375,11.843 77.757,12.225 ; R108.2@75.979,15.715 77.188,15.715 77.757,15.146 77.757,12.225 ; 77.757,3.843 77.757,12.225 ; C610.1@87.028,21.747 87.028,18.723 S600.2@87.445,18.306 ; 87.282,3.792 87.282,9.301 ; C402.2@88.298,10.317 87.282,9.301 ; S600.4@91.945,18.306 S600.2@87.445,18.306 ; D423.1@92.348,90.073 D422.1@95.142,90.073 ; 95.283,8.288 D401.1@95.283,9.815 ; C428.2@99.714,89.825 C428.2@99.728,89.825 100.871,89.825 ; C403.2@99.728,10.317 100.871,10.317 ; 100.871,3.683 100.871,3.792 100.871,10.317 ; 100.998,96.763 100.871,96.636 100.871,89.825 ; C427.2@101.404,89.825 100.871,89.825 ; C404.2@102.014,10.317 100.871,10.317 ; 106.332,3.716 D402.1@106.332,9.815 ; D421.1@106.445,90.073 D421.1@106.459,90.073 D419.1@109.239,90.073 ; 109.634,3.792 D403.1@109.634,9.815 ; C425.2@113.684,89.825 C425.2@113.698,89.825 114.827,89.825 ; C405.2@114.206,10.317 115.349,10.317 ; 114.968,96.763 114.827,96.621 114.827,89.825 ; 115.349,3.792 115.349,10.317 ; C426.2@115.97,89.825 114.827,89.825 ; C406.2@116.492,10.317 115.349,10.317 ; D420.1@120.415,90.2 120.542,90.073 D417.1@123.717,90.073 ; 123.731,8.288 D405.1@123.731,9.815 ; C423.2@128.162,89.698 C423.2@128.176,89.698 129.432,89.698 ; 129.192,9.936 C408.2@130.462,9.936 ; 129.432,96.763 129.432,89.698 ; C424.2@130.448,89.698 129.432,89.698 ; D418.1@134.893,89.946 D418.1@134.907,89.946 D416.1@137.179,89.946 ; 138.082,4.707 D407.1@138.082,9.942 ; C422.2@141.751,89.698 141.919,89.866 142.722,89.866 142.722,96.763 ; C409.2@143.162,10.317 143.543,9.936 143.543,4.707 ; C412.2@149.134,21.079 150.114,20.099 157.005,20.099 ; C414.2@149.134,34.541 149.134,33.307 157.005,33.307 ; C415.2@149.134,47.226 149.134,48.039 ; C416.2@149.134,49.146 149.134,48.039 ; C417.2@149.134,60.83 149.134,62.136 ; C418.2@149.134,63.243 149.134,62.136 ; C419.2@149.134,75.308 149.134,75.474 149.893,76.233 156.878,76.233 ; R435.2@149.385,80.576 v1(149.385,88.552) ; D408.1@149.509,25.397 149.509,26.667 ; D410.1@149.509,38.986 149.509,40.927 ; D411.1@149.509,42.542 149.509,40.927 ; D412.1@149.509,53.464 149.509,55.024 ; D413.1@149.509,56.512 149.509,55.024 ; D414.1@149.509,67.561 149.509,69.085 ; D415.1@149.509,70.609 149.509,69.085 ; D409.1@149.512,27.934 D409.1@149.509,27.937 149.509,26.667 ; 157.005,26.703 156.969,26.667 149.509,26.667 ; 157.005,40.927 149.509,40.927 ; 157.005,48.039 149.134,48.039 ; 157.005,55.024 149.509,55.024 ; 157.005,62.136 149.134,62.136 ; 157.005,68.994 156.914,69.085 149.509,69.085 ; C207.1@27.719,45.419 C206.1@33.942,45.419 ; P205.6@40.8,45.419 P205.8@40.8,47.959 ; P205.6@40.8,45.419 42.07,46.689 ; P205.8@40.8,47.959 42.07,46.689 ; 87.282,9.301 86.266,10.317 v1(86.266,15.4) 86.266,17.127 S600.2@87.445,18.306
  Bottom Layer w1.5: P500.14@72.169,86.266 79.841,86.266 80.551,86.266 84.361,82.456 84.361,79.916 84.564,79.713 v1@87.282,79.713
  Bottom Layer w2: C604.2@20.028,28.989 20.028,25.758 22.385,23.401 22.385,16.543 L601.1@24.548,14.38 ; L601.1@24.802,12.86 C602.1@27.335,12.86 ; C602.1@27.942,12.253 C600.2@30.005,12.253 C603.1@32.068,12.253 ; C603.1@32.672,12.606 C607.1@35.209,12.606 ; 35.72,14.257 35.209,13.746 C609.1@35.209,16.035 35.209,17.81 C606.2@38.559,21.16 ; P101.1@55.184,3.302 65.692,3.302 65.692,3.716 ; U301.31@65.057,48.293 v1(66.962,48.293) ; C108.2@65.692,6.35 65.692,3.716 ; 77.757,3.792 87.282,3.792 95.715,3.792 100.871,3.792 ; 77.757,3.843 75.819,1.905 67.503,1.905 65.692,3.716 ; v1(78.392,53.373) U301.12@80.297,53.373 ; 81.111,93.887 81.111,95.462 82.412,96.763 86.647,96.763 93.759,96.763 ; 93.759,90.711 93.759,96.763 ; v1(98.585,52.484) 99.855,52.484 103.665,56.294 ; 100.871,3.683 106.332,3.683 ; v1(105.138,35.085) 105.138,44.534 103.665,46.007 103.665,56.294 ; v1(105.951,29.065) 105.951,20.505 v1(106.611,19.845) ; 106.332,3.716 v1(108.11,3.716) 147.226,3.716 148.717,5.207 148.717,12.573 ; 107.856,90.711 107.856,96.763 ; v1(108.491,52.103) 108.11,52.484 108.11,66.454 108.615,66.959 ; v1(108.615,70.162) 108.615,66.959 ; 122.08,90.838 122.08,96.763 ; 136.05,90.584 v1(136.05,96.763) ; 142.722,96.763 v1(136.05,96.763) ; v1(145.448,12.86) 156.243,12.86 157.005,13.622 157.005,20.099 157.005,26.703 157.005,33.307 157.005,40.927 157.005,48.039 157.005,55.024 157.005,62.136 157.005,68.994 157.005,88.171 156.624,88.552 v1(149.385,88.552) ; 93.759,96.763 100.998,96.763 107.856,96.763 ; 103.665,56.294 v1(103.665,62.415) U300.8@103.665,67.216 108.358,67.216 108.615,66.959 ; 107.856,96.763 114.968,96.763 122.08,96.763 ; 122.08,96.763 129.432,96.763 v1(136.05,96.763)
VSS_DAC: C208.1 C209.2 C212.1 P203.5 P203.6 P203.7 P203.8 R214.2 R215.1 R218.2 R219.1 U201.4 U202.7 | length 147.3
  Bottom Layer w0.5: 130.208,112.682 130.351,112.825 130.351,115.108 C208.1@131.989,116.746
  Bottom Layer w0.6: 127.033,114.968 127.033,114.333 128.684,112.682 130.208,112.682
  Bottom Layer w1: 127.033,114.968 127.033,116.619 125.382,118.27 125.382,123.858 ; C208.1@131.989,117 131.989,117.26 133.06,118.331 R218.2@134.145,118.331 135.862,118.331 136.538,117.655 C209.2@138.717,117.655 145.722,117.655 ; 136.685,103.792 U201.4@136.685,106.84 ; C212.1@138.333,104.808 137.063,103.538 116.238,103.538 116.238,121.511 R219.1@116.177,121.572 116.177,122.908 117.127,123.858 125.382,123.858 ; U202.7@143.67,114.46 143.67,115.603 145.722,117.655 ; P203.8@152.433,118.016 146.083,118.016 145.722,117.655 ; P203.6@152.814,115.476 P203.5@155.354,115.476 157.767,115.476 158.275,115.984 158.275,122.588 157.005,123.858 125.382,123.858 ; P203.8@152.941,118.016 P203.7@155.354,118.016
VSS_ED: C800.1 C801.2 C802.2 C803.2 C804.2 C805.2 C806.2 P803.1 Q800.2 Q801.2 U800.8 U800.13 U801.6 U801.7 U801.8 U802.2 U803.8 | length 211.3
  Top Layer w0.6: v1(201.676,280.67) 201.689,280.683 U803.8@201.689,282.448 ; U800.8@201.816,267.208 204.089,267.208 ; U800.13@206.616,272.288 205.486,272.288 205.486,271.896 204.962,271.372 204.962,268.081 204.089,267.208 ; C800.1@212.659,266.319 v1(213.995,266.319) 213.995,265.233 213.049,264.287 207.01,264.287 204.089,267.208 ; U802.2@239.522,273.558 243.84,273.558 244.586,272.812 C803.2@245.872,272.812 ; Q800.2@241.461,284.287 248.986,284.287 249.047,284.226 ; Q801.2@241.461,287.843 248.605,287.843 249.047,287.401
  Top Layer w1: v1(206.756,288.417) 208.407,290.068 248.031,290.068 249.047,289.052 249.047,287.401 249.047,284.226 249.047,273.558 248.301,272.812 C803.2@245.872,272.812 245.872,271.018 247.523,269.367 247.523,264.795 247.035,264.307 C802.2@245.491,264.307 ; v1(213.995,266.319) 216.408,266.319 217.17,267.081 v1(217.17,270.891)
  Bottom Layer w0.6: C801.2@212.659,266.319 v1(213.995,266.319)
  Bottom Layer w1: 201.676,273.939 v1(201.676,280.67) 201.676,280.797 197.866,280.797 196.715,281.948 196.715,286.885 198.247,288.417 v1(206.756,288.417) C805.2@206.756,285.259 ; v1(217.17,270.891) 217.17,274.447 223.901,281.178 227.458,281.178 228.728,282.448 231.648,282.448 236.982,277.114 236.982,274.066 237.49,273.558 U802.2@239.522,273.558 241.046,273.558 241.792,272.812 C803.2@245.872,272.812 ; C804.2@243.078,264.734 243.505,264.307 C802.2@245.491,264.307 246.213,263.585 P803.1@246.213,257.048
VSS_O1: C501.2 P517.8 P517.14 Q503.3 U502.10 U503.8 | length 77.5
  Top Layer w2: v1(71.309,212.138) 71.309,220.52 73.595,222.806 U502.10@76.77,222.806 76.77,224.076 v1(79.31,226.616)
  Bottom Layer w1: U503.8@68.007,213.789 U503.8@68.756,213.789 69.531,213.789 74.865,208.455 97.728,208.455 C501.2@99.63,210.357 101.151,208.836 107.25,208.836 107.695,209.281 P517.14@107.695,210.805 109.092,210.805 109.663,211.376 109.663,217.599 108.838,218.425 P517.8@107.695,218.425 ; Q503.3@79.135,228.634 79.135,226.791 v1(79.31,226.616)
VSS_O2: C500.2 P503.8 P503.14 Q501.3 U500.10 U501.8 | length 82.7
  Top Layer w2: v1(33.561,158.171) 36.546,161.156 U500.10@36.546,165.41 45.626,174.49 v1(45.626,175.951)
  Bottom Layer w0.7: v1(33.561,158.171) 33.561,156.138 Q501.3@33.673,156.026
  Bottom Layer w1: P503.8@5.558,169.601 4.351,169.601 3.589,170.363 3.589,176.459 4.351,177.221 P503.14@5.558,177.221 5.558,178.047 6.891,179.38 41.435,179.38 47.404,173.411 U501.8@48.116,173.411 U501.8@48.801,173.411
VSS_SIG2: C701.2 P704.11 Q701.3 Q703.3 Q705.3 Q707.3 Q709.3 Q711.3 Q713.3 Q715.3 U701.1 U701.10 | length 102.6
  Top Layer w1: Q713.3@128.811,218.981 Q709.3@135.542,218.981 148.623,218.981 Q701.3@148.75,218.854 149.258,218.854 151.671,221.267 151.671,226.093 ; U701.10@128.811,241.079 127.033,241.079 ; P704.11@133.256,249.588 132.494,249.588 131.605,248.699 131.605,244.127 127.033,244.127 127.033,241.079 ; Q711.3@135.457,225.712 Q711.3@135.457,225.696 ; U701.1@151.671,241.079 153.576,241.079 153.576,228.76 153.319,228.503 C701.2@151.671,228.503 151.671,226.093 ; 127.033,241.079 127.033,227.49 Q715.3@128.811,225.712 128.827,225.696 Q711.3@135.457,225.696 ; Q711.3@135.457,225.696 148.512,225.696 Q703.3@148.623,225.585 151.163,225.585 151.671,226.093
pads on no net: DS800.6 DS800.9 DS801.6 DS801.9 K508.5 K509.5 K510.5 K513.5 K514.5 K515.5 P300.6 U300.9 U800.9

## Polygon pours and split planes (outlines as drawn)
VSS_ED on Top Layer "Bottom Layer-No Net 1" (hatched 90Degree grid 0.508 track 0.203, remove dead copper, pour order 11): 195.834,290.83 195.834,252.857 251.079,252.857 250.952,252.984 250.952,290.957 195.961,290.957
VSS_O1 on Top Layer "Bottom Layer-No Net" (hatched 45Degree grid 0.508 track 0.3, pour order 8): 113.854,205.153 113.854,230.553 86.803,230.553 82.104,235.252 82.104,277.67 81.977,277.797 32.828,277.797 32.828,205.153 113.727,205.153
VSS_O2 on Top Layer "Bottom Layer-No Net" (hatched 45Degree grid 0.508 track 0.3, pour order 12): 0.795,184.206 77.757,184.206 77.757,103.18 34.196,103.18 33.942,103.434 33.942,151.313 33.942,151.567 29.116,156.393 2.827,156.393 0.922,156.393 0.795,156.266 0.795,184.206
VSS on Top Layer "Bottom Layer-No Net" (hatched 45Degree grid 0.508 track 0.3, pour order 14): 75.606,53.213 98.204,53.213 98.585,52.832 98.679,52.926 98.679,59.563 96.52,59.563 94.107,61.976 84.455,61.976 75.692,61.976 75.606,61.89 75.606,53.213
VSS_ED on Bottom Layer "Bottom Layer-No Net 1" (hatched 90Degree grid 0.508 track 0.203, remove dead copper, pour order 10): 196.088,290.957 250.952,290.957 250.952,252.984 251.079,252.857 195.834,252.857 195.834,290.83 195.961,290.957
VSS_O1 on Bottom Layer "Bottom Layer-No Net" (hatched 45Degree grid 0.508 track 0.3, pour order 9): 72.65,206.042 72.579,206.113 72.579,227.632 62.191,227.632 62.165,227.658 62.165,206.105 72.516,206.105 72.579,206.042
VSS_O2 on Bottom Layer "Bottom Layer-No Net" (hatched 45Degree grid 0.508 track 0.3, pour order 13): 43.721,183.952 43.594,183.825 43.594,158.933 52.434,158.933 52.611,159.11 52.593,159.128 52.593,183.952 43.688,183.952 43.594,183.859

## Keep-outs
Keep-Out Layer:
  circle w0.254: c7.322,155.187 r2
  circle w0.254: c47.581,155.187 r2
  circle w0.254: c58.021,208.767 r2
  circle w0.254: c57.995,274.036 r2
  circle w0.254: c65.26,230.58 r2
  circle w0.254: c89.946,230.553 r2
  circle w0.254: c55.659,107.039 r2
  circle w0.254: c55.659,178.921 r2
  lines w0.254: 195.834,252.73 251.079,252.73 251.079,290.957 195.834,290.957 195.834,252.73

## Silkscreen, mask and mechanical layers (free items; w line width, h text height)
Top Overlay:
  circle w0.254: c8.193,88.806 r2
  circle w0.254: c8.574,59.596 r2
  circle w0.254: c45.658,60.993 r2
  circle w0.254: c45.658,86.52 r2
  circle w0.254: c126.779,248.318 r2
  circle w0.254: c152.306,248.318 r2
  circle w0.254: c153.83,211.107 r2
  circle w0.254: c124.874,211.107 r2
  circle w0.254: c128.208,120.937 r2
  circle w0.254: c155.259,105.57 r2
  circle w0.254: c65.308,230.553 r2
  circle w0.254: c58.069,273.987 r2
  circle w0.254: c58.069,208.709 r2
  circle w0.254: c89.946,230.553 r2
  circle w0.254: c155,95 r2
  circle w0.254: c155,5 r2
  circle w0.254: c5,5 r2
  circle w0.254: c5,95 r2
  circle w0.254: c55.659,106.99 r2
  circle w0.254: c55.659,178.872 r2
  circle w0.254: c47.655,155.187 r2
  circle w0.254: c7.396,155.187 r2
  lines w0.254: 148.369,263.801 148.496,263.674 ; -0.127,101.727 -0.127,201.727 159.873,201.727 159.873,101.727 -0.127,101.727 ; 0,0 160,0 160,100 0,100 0,0 ; 0,202.946 0,302.946 160,302.946 160,202.946 0,202.946 ; 0.414,102.799 112.936,102.799 112.936,184.46 112.936,184.714 0.414,184.714 0.414,103.815 0.414,102.799 ; 0.57,204.264 0.57,278.178 114.616,278.178 114.616,204.264 0.57,204.264 ; 56.134,279.146 56.134,300.99 114.554,300.99 114.554,279.146 56.134,279.146 ; 113.531,102.776 159.418,102.776 159.418,124.62 113.531,124.62 113.531,102.776 ; 117.127,254.276 155.862,254.276 155.862,303.044 117.127,303.044 117.127,254.276 ; 121.953,203.868 156.751,203.868 156.751,253.398 121.953,253.398 121.953,203.868

## Text inside footprints (layer, text, board x,y; h text height)
C201: Top Overlay "+" at 26.181,50.003 h1.5
C209: Top Overlay "+" at 137.967,123.53 h1.5 r270
C302: Top Overlay "+" at 95.238,46.302 h1.5 r90
C600: Top Overlay "+" at 29.255,19.478 h1.5 r270
C604: Top Overlay "+" at 25.003,29.739 h1.5 r180
C606: Top Overlay "+" at 45.861,21.832 h1.5 r180
C608: Top Overlay "+" at 50.871,19.325 h1.5 r180
C802: Top Overlay "+" at 244.741,270.182 h1.5 r270
C803: Top Overlay "+" at 245.122,277.787 h1.5 r270
P203: Top Overlay "2" at 153.322,107.856 h1.27 r90; Top Overlay "1" at 155.862,108.364 h1.27 r90; Top Overlay "9" at 155.862,122.08 h1.27 r90; Top Overlay "10" at 153.322,122.08 h1.27 r90
P205: Top Overlay "2" at 41.308,37.799 h1.27 r90; Top Overlay "1" at 43.848,38.307 h1.27 r90; Top Overlay "9" at 43.848,52.023 h1.27 r90; Top Overlay "10" at 41.308,52.023 h1.27 r90
P415: Top Overlay "2" at 18.829,95.627 h1.27; Top Overlay "1" at 18.829,93.087 h1.27; Top Overlay "1" at 36.101,93.087 h1.27; Top Overlay "1" at 37.117,93.087 h1.27; Top Overlay "12" at 36.101,95.627 h1.27
P500: Top Overlay "1" at 54.389,83.218 h1.27; Top Overlay "8" at 54.389,85.758 h1.27; Top Overlay "7" at 74.201,83.218 h1.27; Top Overlay "14" at 74.201,85.758 h1.27
P503: Top Overlay "13" at 8.606,179.253 h1.27 r90; Top Overlay "14" at 6.066,179.253 h1.27 r90; Top Overlay "1" at 8.606,158.933 h1.27 r90; Top Overlay "2" at 6.066,158.933 h1.27 r90
P514: Top Overlay "8" at 54.389,95.627 h1.27; Top Overlay "1" at 54.389,93.087 h1.27; Top Overlay "7" at 74.201,93.087 h1.27; Top Overlay "14" at 74.201,95.627 h1.27
P517: Top Overlay "13" at 104.647,208.773 h1.27 r270; Top Overlay "14" at 107.187,208.773 h1.27 r270; Top Overlay "1" at 104.647,229.093 h1.27 r270; Top Overlay "2" at 107.187,229.093 h1.27 r270
P700: Top Overlay "16" at 132.433,277.898 h1.27 r180; Top Overlay "15" at 132.433,280.438 h1.27 r180; Top Overlay "1" at 154.277,280.438 h1.27 r180; Top Overlay "2" at 154.277,277.898 h1.27 r180
P701: Top Overlay "16" at 7.653,84.234 h1.27 r90; Top Overlay "15" at 10.193,84.234 h1.27 r90; Top Overlay "1" at 10.193,62.39 h1.27 r90; Top Overlay "2" at 7.653,62.39 h1.27 r90
P702: Top Overlay "16" at 129.319,210.345 h1.27 r180; Top Overlay "15" at 129.319,212.885 h1.27 r180; Top Overlay "1" at 151.163,212.885 h1.27 r180; Top Overlay "2" at 151.163,210.345 h1.27 r180
P703: Top Overlay "2" at 44.864,64.676 h1.27 r90; Top Overlay "1" at 47.404,64.676 h1.27 r90; Top Overlay "1" at 47.404,81.948 h1.27 r90; Top Overlay "1" at 47.404,82.964 h1.27 r90; Top Overlay "12" at 44.864,81.948 h1.27 r90
P704: Top Overlay "2" at 148.496,247.556 h1.27 r180; Top Overlay "1" at 148.496,250.096 h1.27 r180; Top Overlay "1" at 131.224,250.096 h1.27 r180; Top Overlay "1" at 130.208,250.096 h1.27 r180; Top Overlay "12" at 131.224,247.556 h1.27 r180
Q700: Top Overlay "1" at 12.913,63.129 h1.5 r270; Top Overlay "3" at 15.359,63.129 h1.5 r270
Q701: Top Overlay "1" at 151.171,215.605 h1.5; Top Overlay "3" at 151.171,218.051 h1.5
Q702: Top Overlay "1" at 19.644,63.129 h1.5 r270; Top Overlay "3" at 22.09,63.129 h1.5 r270
Q703: Top Overlay "1" at 151.044,222.336 h1.5; Top Overlay "3" at 151.044,224.782 h1.5
Q704: Top Overlay "1" at 12.913,69.691 h1.5 r270; Top Overlay "3" at 15.359,69.691 h1.5 r270
Q705: Top Overlay "1" at 144.567,215.605 h1.5; Top Overlay "3" at 144.567,218.051 h1.5
Q706: Top Overlay "1" at 19.644,69.691 h1.5 r270; Top Overlay "3" at 22.09,69.691 h1.5 r270
Q707: Top Overlay "1" at 144.44,222.336 h1.5; Top Overlay "3" at 144.44,224.782 h1.5
Q708: Top Overlay "1" at 12.913,76.252 h1.5 r270; Top Overlay "3" at 15.359,76.252 h1.5 r270
Q709: Top Overlay "1" at 137.963,215.732 h1.5; Top Overlay "3" at 137.963,218.178 h1.5
Q710: Top Overlay "1" at 19.644,76.252 h1.5 r270; Top Overlay "3" at 22.09,76.252 h1.5 r270
Q711: Top Overlay "1" at 137.878,222.463 h1.5; Top Overlay "3" at 137.878,224.909 h1.5
Q712: Top Overlay "1" at 12.913,82.814 h1.5 r270; Top Overlay "3" at 15.359,82.814 h1.5 r270
Q713: Top Overlay "1" at 131.232,215.732 h1.5; Top Overlay "3" at 131.232,218.178 h1.5
Q714: Top Overlay "1" at 19.644,82.814 h1.5 r270; Top Overlay "3" at 22.09,82.814 h1.5 r270
Q715: Top Overlay "1" at 131.232,222.463 h1.5; Top Overlay "3" at 131.232,224.909 h1.5
U601: Top Overlay "1" at 43.856,12.278 h1.5; Top Overlay "3" at 43.856,14.724 h1.5
U802: Top Overlay "1" at 237.101,275.537 h1.5 r180; Top Overlay "3" at 237.101,273.091 h1.5 r180